# EAGLE board CT_schematic (EAGLE 7.6.0)

Size 100 x 80 mm. Coordinates in mm from the lower left corner, seen from the top.
Outline: 0,0 100,0 100,80 0,80 0,0
Copper layers (1*16): Top 0.035mm / dielectric 1.5mm / Bottom 0.035mm
Design rules "default": minimum track width 10mil, minimum drill 24mil, track to track 8mil, track to pad 8mil, pad to pad 8mil, via to via 8mil, smd to smd 8mil, copper to edge 40mil, drill to drill 8mil, minimum pad ring 10mil, minimum via ring 8mil, stop-mask expansion 4mil, vias tented up to drill 0mil, thermal gap 10mil

## Footprints (pad centres in the part's own frame; a part is rotated, then mirrored left to right if it is on the bottom)
C0603 = smd 0.8 x 0.8: 1 -0.762,0; 2 0.762,0
C0402 = smd 0.5 x 0.5: 1 -0.508,0; 2 0.508,0
C1210 = smd 1.2 x 2.5: 1 -1.524,0; 2 1.524,0
C0805 = smd 1.2 x 1.3: 1 -1.016,0; 2 1.016,0
2220 = smd 1.85 x 5.5: 1 -2.55,0; 2 2.55,0
C1206 = smd 1.3 x 1.6: 1 -1.524,0; 2 1.524,0
L0603 = smd 0.8 x 0.8: 1 -0.762,0; 2 0.762,0
R0603 = smd 0.8 x 0.8: 1 -0.762,0; 2 0.762,0
WLCSP90 = smd 0.25 x 0.25: A1 -1.8,1.6; A2 -1.4,1.6; A3 -1,1.6; A4 -0.6,1.6; A5 -0.2,1.6; A6 0.2,1.6; A7 0.6,1.6; A8 1,1.6; A9 1.4,1.6; A10 1.8,1.6; B1 -1.8,1.2; B2 -1.4,1.2; B3 -1,1.2; B4 -0.6,1.2; B5 -0.2,1.2; B6 0.2,1.2; B7 0.6,1.2; B8 1,1.2; B9 1.4,1.2; B10 1.8,1.2; C1 -1.8,0.8; C2 -1.4,0.8; C3 -1,0.8; C4 -0.6,0.8; C5 -0.2,0.8; C6 0.2,0.8; C7 0.6,0.8; C8 1,0.8; C9 1.4,0.8; C10 1.8,0.8; D1 -1.8,0.4; D2 -1.4,0.4; D3 -1,0.4; D4 -0.6,0.4; D5 -0.2,0.4; D6 0.2,0.4; D7 0.6,0.4; D8 1,0.4; D9 1.4,0.4; D10 1.8,0.4; E1 -1.8,0; E2 -1.4,0; E3 -1,0; E4 -0.6,0; E5 -0.2,0; E6 0.2,0; E7 0.6,0; E8 1,0; E9 1.4,0; E10 1.8,0; F1 -1.8,-0.4; F2 -1.4,-0.4; F3 -1,-0.4; F4 -0.6,-0.4; F5 -0.2,-0.4; F6 0.2,-0.4; F7 0.6,-0.4; F8 1,-0.4; F9 1.4,-0.4; F10 1.8,-0.4; G1 -1.8,-0.8; G2 -1.4,-0.8; G3 -1,-0.8; G4 -0.6,-0.8; G5 -0.2,-0.8; G6 0.2,-0.8; G7 0.6,-0.8; G8 1,-0.8; G9 1.4,-0.8; G10 1.8,-0.8; H1 -1.8,-1.2; H2 -1.4,-1.2; H3 -1,-1.2; H4 -0.6,-1.2; H5 -0.2,-1.2; H6 0.2,-1.2; H7 0.6,-1.2; H8 1,-1.2; H9 1.4,-1.2; H10 1.8,-1.2; J1 -1.8,-1.6; J2 -1.4,-1.6; J3 -1,-1.6; J4 -0.6,-1.6; J5 -0.2,-1.6; J6 0.2,-1.6; J7 0.6,-1.6; J8 1,-1.6; J9 1.4,-1.6; J10 1.8,-1.6
TST-110-05-T-D-RA = drill 1 pad 1.7 square: 1 0,0 | drill 1 pad 1.7: 2 0,2.54; 3 2.54,0; 4 2.54,2.54; 5 5.08,0; 6 5.08,2.54; 7 7.62,0; 8 7.62,2.54; 9 10.16,0; 10 10.16,2.54; 11 12.7,0; 12 12.7,2.54; 13 15.24,0; 14 15.24,2.54; 15 17.78,0; 16 17.78,2.54; 17 20.32,0; 18 20.32,2.54; 19 22.86,0; 20 22.86,2.54
SOT-23-8 = smd 0.4 x 1.2: 1 -0.975,-1.3; 2 -0.325,-1.3; 3 0.325,-1.3; 4 0.975,-1.3; 5 0.975,1.3; 6 0.325,1.3; 7 -0.325,1.3; 8 -0.975,1.3
182-009-MALE = drill 1.194 pad 1.524 octagon: 1 -5.537,10.923; 2 -2.769,10.923; 3 0,10.923; 4 2.769,10.923; 5 5.537,10.923; 6 -4.153,8.08; 7 -1.384,8.08; 8 1.384,8.08; 9 4.153,8.08 | hole 3.048: -12.446,9.501; 12.446,9.501
WNG008 = smd 0.45 x 0.55: 1 -1.27,0; 2 0,0; 3 1.27,0; 4 2.54,0; 5 2.54,7.5; 6 1.27,7.5; 7 0,7.5; 8 -1.27,7.53 | smd 4.9 x 4.75: PAD 0.635,3.75
RHB32_3P45X3P45 = smd 0.85 x 0.28: 1 -2.475,1.75; 2 -2.475,1.25; 3 -2.475,0.75; 4 -2.475,0.25; 5 -2.475,-0.25; 6 -2.475,-0.75; 7 -2.475,-1.25; 8 -2.475,-1.75; 17 2.475,-1.75; 18 2.475,-1.25; 19 2.475,-0.75; 20 2.475,-0.25; 21 2.475,0.25; 22 2.475,0.75; 23 2.475,1.25; 24 2.475,1.75 | smd 0.28 x 0.85: 9 -1.75,-2.475; 10 -1.25,-2.475; 11 -0.75,-2.475; 12 -0.25,-2.475; 13 0.25,-2.475; 14 0.75,-2.475; 15 1.25,-2.475; 16 1.75,-2.475; 25 1.75,2.475; 26 1.25,2.475; 27 0.75,2.475; 28 0.25,2.475; 29 -0.25,2.475; 30 -0.75,2.475; 31 -1.25,2.475; 32 -1.75,2.475 | smd 3.45 x 3.45: 33 0,0
FCI_10118193-0001LF = smd 0.4 x 1.35: 1 -1.3,2.675; 2 -0.65,2.675; 3 0,2.675; 4 0.65,2.675; 5 1.3,2.675 | smd 1.6 x 1.4: 6 -3.2,2.45; 7 3.2,2.45 | smd 1.9 x 1.9: 8 -1.2,0; 9 1.2,0 | hole 0.5: -3.3,0; 3.3,0
SOT143B = smd 1 x 0.7: 1 -0.75,-1 | smd 0.6 x 0.7: 2 0.95,-1; 3 0.95,1; 4 -0.95,1
QFN-28 = smd 0.813 x 0.305: 1 -2.451,1.5; 2 -2.451,1; 3 -2.451,0.5; 4 -2.451,0; 5 -2.451,-0.5; 6 -2.451,-1; 7 -2.451,-1.5; 15 2.451,-1.5; 16 2.451,-1; 17 2.451,-0.5; 18 2.451,0; 19 2.451,0.5; 20 2.451,1; 21 2.451,1.5 | smd 0.305 x 0.813: 8 -1.5,-2.451; 9 -1,-2.451; 10 -0.5,-2.451; 11 0,-2.451; 12 0.5,-2.451; 13 1,-2.451; 14 1.5,-2.451; 22 1.5,2.451; 23 1,2.451; 24 0.5,2.451; 25 0,2.451; 26 -0.5,2.451; 27 -1,2.451; 28 -1.5,2.451 | smd 3.607 x 3.607: 29 0,0
SJ-43515TS-SMT-TR = smd 2.2 x 3: 1 0.6,-7.4; 4 3.4,-7.4 | smd 3 x 3: 2 12.8,-7.4; 5 17,-3 | smd 2 x 3: 3 5.3,0; 6 2.5,0 | drill 1.8: P$7 4.5,-3.69; P$8 11.54,-3.69
ASEK = smd 1.4 x 1: 1 -1.1,-0.8; 2 1.1,-0.8; 3 1.1,0.8; 4 -1.1,0.8
ASFL1 = smd 1.7 x 1.5: 1 -1.27,-1.1; 2 1.27,-1.1; 3 1.27,1.1; 4 -1.27,1.1
MSOP-8_EP = smd 1.422 x 0.508: 1 -2.095,0.975; 2 -2.095,0.325; 3 -2.095,-0.325; 4 -2.095,-0.975; 5 2.095,-0.975; 6 2.095,-0.325; 7 2.095,0.325; 8 2.095,0.975 | smd 1.727 x 1.702: EPAD 0,0
SOIC-8_EP = smd 1.6 x 0.533: 1 -2.921,1.905; 2 -2.921,0.635; 3 -2.921,-0.635; 4 -2.921,-1.905; 5 2.921,-1.905; 6 2.921,-0.635; 7 2.921,0.635; 8 2.921,1.905 | smd 2.54 x 3.302: EPAD 0,0 | drill 0.406 pad 0.406: P$1 -0.508,0.635; P$2 0.381,0.635; P$3 -0.508,-0.635; P$4 0.381,-0.635
DFN8_2X3MC = smd 0.813 x 0.305: 1 -1.398,0.75; 2 -1.398,0.25; 3 -1.398,-0.25; 4 -1.398,-0.75; 5 1.398,-0.75; 6 1.398,-0.25; 7 1.398,0.25; 8 1.398,0.75 | smd 1.753 x 1.549: 9 0,0
JST-2-SMD = smd 1 x 4.6: 1 -1,-3.7; 2 1,-3.7 | smd 1.6 x 3.4: NC1 -3.4,1.5; NC2 3.4,1.5
SON-6 = smd 0.55 x 0.3: 1 -0.355,0.5 | smd 0.52 x 0.3: 2 -0.37,0; 3 -0.37,-0.5; 4 0.37,-0.5; 5 0.37,0; 6 0.37,0.5
DCU0008A_N = smd 0.5 x 0.3: 1 -1.6,0.75; 2 -1.6,0.25; 3 -1.6,-0.25; 4 -1.6,-0.75; 5 1.6,-0.75; 6 1.6,-0.25; 7 1.6,0.25; 8 1.6,0.75
SW_4-1437565-2 = smd 1.4 x 2.1: 1 -2.23,4.55; 2 -2.23,-4.55; 3 2.23,4.55; 4 2.23,-4.55
LGM67K-G1J2-24-Z = smd 0.8 x 1.4: A -2,0; C 0,0
NC7SZ125M5X = smd 1.3 x 0.7: 1 -1.3,0.95; 2 -1.3,0; 3 -1.3,-0.95; 4 1.3,-0.95; 5 1.3,0.95

## Placement (x,y rotation side)
C1  1e-06  [C0603]  -68.58,85.09 0 top  (outside the outline)
C2  1e-07  [C0603]  -72.39,85.09 0 top  (outside the outline)
C3  1e-07  [C0603]  -76.2,85.09 0 top  (outside the outline)
C4  1e-07  [C0603]  -80.01,85.09 0 top  (outside the outline)
C5  1e-07  [C0603]  -83.82,85.09 0 top  (outside the outline)
C6  1e-07  [C0603]  -87.63,85.09 0 top  (outside the outline)
C7  1e-07  [C0603]  -15.24,90.17 0 top  (outside the outline)
C8  4.7e-06  [C0603]  -49.53,85.09 0 top  (outside the outline)
C9  1e-08  [C0603]  -19.05,90.17 0 top  (outside the outline)
C10  1e-06  [C0603]  -22.86,90.17 0 top  (outside the outline)
C11  2.2e-06  [C0603]  -53.34,85.09 0 top  (outside the outline)
C12  2.2e-06  [C0603]  -57.15,85.09 0 top  (outside the outline)
C13  1e-06  [C0603]  -26.67,90.17 0 top  (outside the outline)
C14  1e-07  [C0402]  -76.2,90.17 0 top  (outside the outline)
C15  1e-07  [C0402]  -80.01,90.17 0 top  (outside the outline)
C16  1e-07  [C0402]  -83.82,90.17 0 top  (outside the outline)
C17  1e-08  [C0402]  -87.63,90.17 0 top  (outside the outline)
C18  1e-07  [C0402]  -91.44,90.17 0 top  (outside the outline)
C19  2.2e-06  [C0603]  -60.96,85.09 0 top  (outside the outline)
C20  1e-07  [C0402]  -15.24,95.25 0 top  (outside the outline)
C21  1e-07  [C0402]  -19.05,95.25 0 top  (outside the outline)
C22  2.2e-06  [C0603]  -64.77,85.09 0 top  (outside the outline)
C23  1e-06  [C0603]  -30.48,90.17 0 top  (outside the outline)
C24  2.2e-05  [C1210]  -38.1,68.58 0 top  (outside the outline)
C25  2.2e-05  [C1210]  -44.45,68.58 0 top  (outside the outline)
C26  1e-09  [C0402]  -22.86,95.25 0 top  (outside the outline)
C27  1e-09  [C0402]  -26.67,95.25 0 top  (outside the outline)
C28  1e-07  [C0402]  -30.48,95.25 0 top  (outside the outline)
C29  1e-07  [C0402]  -34.29,95.25 0 top  (outside the outline)
C30  1e-07  [C0402]  -38.1,95.25 0 top  (outside the outline)
C31  1e-07  [C0402]  -41.91,95.25 0 top  (outside the outline)
C32  1e-07  [C0402]  -45.72,95.25 0 top  (outside the outline)
C33  1e-05  [C0805]  -41.91,74.93 0 top  (outside the outline)
C34  1e-05  [C0805]  -46.99,74.93 0 top  (outside the outline)
C35  1e-05  [C0805]  -52.07,74.93 0 top  (outside the outline)
C36  1e-05  [C0805]  -57.15,74.93 0 top  (outside the outline)
C37  1e-05  [C0805]  -62.23,74.93 0 top  (outside the outline)
C38  1e-08  [C0402]  -49.53,95.25 0 top  (outside the outline)
C39  1e-08  [C0402]  -53.34,95.25 0 top  (outside the outline)
C40  1e-08  [C0402]  -57.15,95.25 0 top  (outside the outline)
C41  1e-08  [C0402]  -60.96,95.25 0 top  (outside the outline)
C42  6.8e-05  [2220]  -31.75,41.91 0 top  (outside the outline)
C43  1e-06  [C0603]  -34.29,90.17 0 top  (outside the outline)
C44  6.8e-05  [2220]  -39.37,41.91 0 top  (outside the outline)
C45  1e-05  [C1210]  -50.8,68.58 0 top  (outside the outline)
C46  1e-05  [C1210]  -57.15,68.58 0 top  (outside the outline)
C47  1e-05  [C1210]  -63.5,68.58 0 top  (outside the outline)
C48  1e-05  [C1210]  -69.85,68.58 0 top  (outside the outline)
C49  1e-07  [C0402]  -64.77,95.25 0 top  (outside the outline)
C50  1e-05  [C1206]  -76.2,67.31 0 top  (outside the outline)
C51  1e-05  [C1206]  -82.55,67.31 0 top  (outside the outline)
C52  1e-08  [C0402]  -68.58,95.25 0 top  (outside the outline)
C53  1e-07  [C0402]  -72.39,95.25 0 top  (outside the outline)
C54  1e-08  [C0402]  -76.2,95.25 0 top  (outside the outline)
C55  1e-07  [C0402]  -80.01,95.25 0 top  (outside the outline)
C56  1e-08  [C0402]  -83.82,95.25 0 top  (outside the outline)
C57  1e-08  [C0402]  -87.63,95.25 0 top  (outside the outline)
C58  1e-08  [C0402]  -91.44,95.25 0 top  (outside the outline)
F1  240.0  [L0603]  -38.1,90.17 0 top  (outside the outline)
R2  1000.0  [R0603]  -41.91,90.17 0 top  (outside the outline)
R7  4700.0  [R0603]  -45.72,90.17 0 top  (outside the outline)
R8  4700.0  [R0603]  -49.53,90.17 0 top  (outside the outline)
R9  10000.0  [R0603]  -15.24,80.01 0 top  (outside the outline)
R10  10000.0  [R0603]  -20.32,80.01 0 top  (outside the outline)
R11  10000.0  [R0603]  -25.4,80.01 0 top  (outside the outline)
R12  10000.0  [R0603]  -30.48,80.01 0 top  (outside the outline)
R13  10000.0  [R0603]  -35.56,80.01 0 top  (outside the outline)
R14  10000.0  [R0603]  -40.64,80.01 0 top  (outside the outline)
R15  10000.0  [R0603]  -45.72,80.01 0 top  (outside the outline)
R16  10000.0  [R0603]  -50.8,80.01 0 top  (outside the outline)
R17  10000.0  [R0603]  -55.88,80.01 0 top  (outside the outline)
R18  120.0  [R0603]  -53.34,90.17 0 top  (outside the outline)
R19  10000.0  [R0603]  -60.96,80.01 0 top  (outside the outline)
R20  10000.0  [R0603]  -66.04,80.01 0 top  (outside the outline)
R21  10000.0  [R0603]  -71.12,80.01 0 top  (outside the outline)
R22  10000.0  [R0603]  -76.2,80.01 0 top  (outside the outline)
R23  10000.0  [R0603]  -81.28,80.01 0 top  (outside the outline)
R24  47000.0  [R0603]  -86.36,80.01 0 top  (outside the outline)
R25  47000.0  [R0603]  -15.24,85.09 0 top  (outside the outline)
R26  47000.0  [R0603]  -20.32,85.09 0 top  (outside the outline)
R27  680.0  [R0603]  -57.15,90.17 0 top  (outside the outline)
R28  3900.0  [R0603]  -60.96,90.17 0 top  (outside the outline)
R29  2200.0  [R0603]  -64.77,90.17 0 top  (outside the outline)
R30  10000.0  [R0603]  -25.4,85.09 0 top  (outside the outline)
R31  4031.5447154472  [R0603]  -71.12,74.93 0 top  (outside the outline)
R32  2200.0  [R0603]  -68.58,90.17 0 top  (outside the outline)
R33  10000.0  [R0603]  -30.48,85.09 0 top  (outside the outline)
R34  10000.0  [R0603]  -35.56,85.09 0 top  (outside the outline)
R35  82000.0  [R0603]  -40.64,85.09 0 top  (outside the outline)
R36  300000.0  [R0603]  -76.2,74.93 0 top  (outside the outline)
R37  120000.0  [R0603]  -81.28,74.93 0 top  (outside the outline)
R38  2000.0  [R0603]  -72.39,90.17 0 top  (outside the outline)
R39  10000.0  [R0603]  -45.72,85.09 0 top  (outside the outline)
R40  200000.0  [R0603]  -86.36,74.93 0 top  (outside the outline)
U1  STM32F405OGY6  [WLCSP90]  -63.5,52.07 0 top  (outside the outline)
U2  TST-110-05-T-D-RA  [TST-110-05-T-D-RA]  -46.99,58.42 0 top  (outside the outline)
U3  MAX3051EKA+T  [SOT-23-8]  -87.63,67.31 0 top  (outside the outline)
U4  182-009-113R531  [182-009-MALE]  -36.83,6.35 0 top  (outside the outline)
U5  S25FL128SDPNFI001  [WNG008]  -76.2,25.4 0 top  (outside the outline)
U6  TUSB1210BRHBR  [RHB32_3P45X3P45]  -73.66,60.96 0 top  (outside the outline)
U7  10118193-0001LF  [FCI_10118193-0001LF]  -35.56,50.8 0 top  (outside the outline)
U8  prtr5v0u2ax  [SOT143B]  -24.13,100.33 0 top  (outside the outline)
U9  10118193-0001LF  [FCI_10118193-0001LF]  -45.72,50.8 0 top  (outside the outline)
U10  prtr5v0u2ax  [SOT143B]  -36.83,100.33 0 top  (outside the outline)
U11  WM8731CLSEFL  [QFN-28]  -30.48,68.58 0 top  (outside the outline)
U12  SJ-43515TS-SMT-TR  [SJ-43515TS-SMT-TR]  -78.74,10.16 0 top  (outside the outline)
U13  SJ-43515TS-SMT-TR  [SJ-43515TS-SMT-TR]  -39.37,31.75 0 top  (outside the outline)
U14  ASEK-32.768KHz-ECST  [ASEK]  -66.04,60.96 0 top  (outside the outline)
U15  ASFL1-12.288MHZ-EC-T  [ASFL1]  -60.96,41.91 0 top  (outside the outline)
U16  ASFL1-19.2MHZ-NCS  [ASFL1]  -78.74,41.91 0 top  (outside the outline)
U17  ASFL1-25MHZ-NCS  [ASFL1]  -26.67,52.07 0 top  (outside the outline)
U18  MIC47100YMME  [MSOP-8_EP]  -16.51,74.93 0 top  (outside the outline)
U19  MIC5234YME  [SOIC-8_EP]  -82.55,59.69 0 top  (outside the outline)
U20  MCP73831T-2ACI/MC  [DFN8_2X3MC]  -60.96,99.06 0 top  (outside the outline)
U21  S2B-PH-SM4-TB(LF)(SN)  [JST-2-SMD]  -22.86,43.18 0 top  (outside the outline)
U22  TPS3895ADRYR  [SON-6]  -54.61,99.06 0 top  (outside the outline)
U23  LSF0102DCTR  [DCU0008A_N]  -49.53,99.06 0 top  (outside the outline)
U24  4-1437565-2  [SW_4-1437565-2]  -55.88,27.94 0 top  (outside the outline)
U25  Q65110A2395  [LGM67K-G1J2-24-Z]  -17.78,68.58 0 top  (outside the outline)
U26  nc7sz125m5x  [NC7SZ125M5X]  -22.86,73.66 0 top  (outside the outline)
U27  nc7sz125m5x  [NC7SZ125M5X]  -29.21,73.66 0 top  (outside the outline)
U28  nc7sz125m5x  [NC7SZ125M5X]  -35.56,73.66 0 top  (outside the outline)

## Library data of the parts
C1-C58 F1 R2 R7-R40 U1-U28 = circuit_tree

## Nets
CLK_U1_B10: U1.B10 U14.3
CLK_U1_F10: U1.F10 U17.3
CLK_U6_1: U6.1 U16.3
CLK_U11_1: U11.1 U15.3
GND: C1.2 C2.2 C3.2 C4.2 C5.2 C6.2 C7.2 C8.2 C9.2 C10.2 C11.2 C12.2 C13.2 C14.2 C15.2 C16.2 C17.2 C18.2 C19.2 C20.2 C21.2 C22.2 C23.2 C27.2 C28.2 C29.2 C30.2 C31.2 C32.2 C33.2 C34.2 C35.2 C36.2 C37.2 C38.2 C39.2 C40.2 C41.2 C42.2 C43.2 C44.2 C45.2 C46.2 C47.2 C48.2 C49.2 C50.2 C51.2 C52.2 C53.2 C54.2 C55.2 C56.2 C57.2 C58.2 R2.2 R10.2 R11.2 R17.2 R23.2 R24.2 R25.2 R26.2 R29.2 R32.2 R35.2 R37.2 R38.2 U1.C1 U1.C9 U1.E5 U1.E7 U1.E8 U1.H10 U2.4 U2.6 U2.8 U2.10 U2.12 U2.14 U2.16 U2.18 U2.20 U3.2 U3.8 U4.5 U5.4 U5.PAD U6.33 U7.5 U7.6 U7.7 U7.8 U7.9 U8.1 U9.5 U9.6 U9.7 U9.8 U9.9 U10.1 U11.4 U11.15 U11.19 U11.25 U11.26 U11.29 U12.1 U13.1 U14.2 U15.2 U16.2 U17.2 U18.3 U18.EPAD U19.7 U19.EPAD U20.6 U20.9 U21.2 U22.2 U23.1 U25.C U26.2 U26.3 U27.1 U27.3 U28.1 U28.3
INPUT_USBPOWER_5V: C23.1 C50.1 R39.2 U6.22 U7.1 U8.4 U20.1 U20.2
NET_U1_A7: R10.1 U1.A7
NET_U1_A8: R9.1 U1.A8
NET_U1_B1: C12.1 U1.B1
NET_U1_D9: R11.1 U1.D9
NET_U1_F4: C11.1 U1.F4
NET_U1_G9: C9.1 C10.1 F1.1 U1.G9
NET_U1_G10: R7.1 U1.G10 U27.4
NET_U1_J8: U25.A
NET_U1_J10: U24.3 U24.4
NET_U2_19: R17.1 U2.19
NET_U3_6: R18.2 U3.6
NET_U4_2: R18.2 U3.6 U4.2
NET_U4_3: R18.1 U3.7 U4.3
NET_U5_3: R19.1 U5.3
NET_U5_7: R21.1 U5.7
NET_U6_11: R22.1 U6.11
NET_U6_12: C22.1 U6.12
NET_U6_14: R23.1 U6.14
NET_U6_20: C19.1 U6.20
NET_U6_27: R8.1 U6.27 U28.4
NET_U7_2: U6.19 U7.2 U8.3
NET_U7_3: U6.18 U7.3 U8.2
NET_U11_9: U11.9
NET_U11_20: C32.1 C37.1 U11.20
NET_U12_2: C25.1 R25.1 U12.2
NET_U12_5: C24.1 R24.1 U12.5
NET_U12_13: C24.2
NET_U12_14: C25.2
NET_U13_5: C26.1 C27.1 R26.1 R27.1 U13.5
NET_U13_21: R27.2
NET_U13_22: C26.2
NET_U18_6: R28.2 R29.1 U18.6
NET_U19_4: R31.2 R32.1 U19.4
NET_U20_5: R39.1 U20.5
NET_U20_8: R38.1 U20.8
NET_U22_1: R34.1 R35.1 U22.1
NET_U22_3: R36.2 R37.1 U22.3
NET_U22_4: R33.1 U22.4 U26.4 U27.2 U28.2
NET_U23_8: R40.1 U23.8
NET_U24_1: R2.1 U24.1 U24.2
PROC_CAN1_RX_TOIOBUF: U23.4
PROC_CAN1_RX_TOXCVR: U3.4 U23.5
PROC_CAN1_TX_TOIOBUF: U23.3
PROC_CAN1_TX_TOXCVR: U3.1 U23.6
PROC_I2S3_CK: U1.D5 U11.7
PROC_I2S3_EXT_SD: U1.C4 U11.10
PROC_I2S3_SD: U1.A3 U11.8
PROC_I2S3_WS: U1.J9 U11.9 U11.11
PROC_SPI2_MISO: U1.J2 U5.2
PROC_SPI2_MOSI: U1.H1 U5.5
PROC_SPI2_NSS: R20.1 U1.C3 U5.1
PROC_SPI2_SCK: U1.B2 U5.6
PROC_SYS_JTCK_SWCLK: R15.1 U1.A2 U2.9
PROC_SYS_JTDI: R13.1 U1.B3 U2.5
PROC_SYS_JTDO_SWO: U1.B6 U2.13
PROC_SYS_JTMS_SWDIO: R14.1 U1.D4 U2.7
PROC_SYS_JTRST: R12.1 U1.A6 U2.3
PROC_USB_OTG_FS_DM: U1.C1 U9.2 U10.3
PROC_USB_OTG_FS_DP: U1.C2 U9.3 U10.2
PROC_USB_OTG_FS_VBUS: C13.1 U1.D2 U9.1 U10.4
PROC_USB_OTG_HS_ULPI_CK: U1.G8 U6.26
PROC_USB_OTG_HS_ULPI_D0: U1.H9 U6.3
PROC_USB_OTG_HS_ULPI_D1: U1.G7 U6.4
PROC_USB_OTG_HS_ULPI_D2: U1.H7 U6.5
PROC_USB_OTG_HS_ULPI_D3: U1.H4 U6.6
PROC_USB_OTG_HS_ULPI_D4: U1.J4 U6.7
PROC_USB_OTG_HS_ULPI_D5: U1.J3 U6.9
PROC_USB_OTG_HS_ULPI_D6: U1.J1 U6.10
PROC_USB_OTG_HS_ULPI_D7: U1.D7 U6.13
PROC_USB_OTG_HS_ULPI_DIR: U1.D10 U6.31
PROC_USB_OTG_HS_ULPI_NXT: U1.E9 U6.2
PROC_USB_OTG_HS_ULPI_STP: U1.E10 U6.29
RST_OUT_U2_SRESET_B: R16.1 U2.15 U26.1
VCC_S1_3V7: C42.1 C43.1 C45.1 C46.1 C51.1 R30.1 R30.2 U18.1 U18.2 U18.4 U18.5 U19.5 U19.8 U20.3 U20.4 U21.1
VCC_TIER1_1V8: C1.1 C2.1 C3.1 C4.1 C5.1 C6.1 C7.1 C8.1 C15.1 C17.1 C20.1 C21.1 C28.1 C29.1 C30.1 C31.1 C33.1 C34.1 C35.1 C36.1 C44.1 C49.1 C54.1 C55.1 C56.1 C57.1 C58.1 F1.2 R7.2 R8.2 R9.2 R12.2 R13.2 R14.2 R15.2 R16.2 R19.2 R20.2 R21.2 R22.2 R28.1 R33.2 R34.2 R36.1 U1.A1 U1.A10 U1.B8 U1.E4 U1.E6 U1.F7 U2.1 U5.8 U6.28 U6.30 U6.32 U11.3 U11.5 U11.12 U11.18 U18.7 U18.8 U22.6 U23.2 U26.5 U27.5 U28.5
VCC_TIER1_3V3: C14.1 C16.1 C18.1 C38.1 C39.1 C40.1 C41.1 C47.1 C48.1 C52.1 C53.1 R31.1 R40.2 U2.2 U3.3 U6.21 U14.4 U15.4 U16.4 U17.4 U19.1 U23.7

## Tracks (layer width: path | path; a pad name or v marks a point on that pad's centre or on a via)
CLK_U1_B10  (1 unrouted)
CLK_U1_F10  (1 unrouted)
CLK_U6_1  (1 unrouted)
CLK_U11_1  (1 unrouted)
GND  (128 unrouted)
INPUT_USBPOWER_5V  (7 unrouted)
NET_U1_A7  (1 unrouted)
NET_U1_A8  (1 unrouted)
NET_U1_B1  (1 unrouted)
NET_U1_D9  (1 unrouted)
NET_U1_F4  (1 unrouted)
NET_U1_G9  (3 unrouted)
NET_U1_G10  (2 unrouted)
NET_U1_J10  (1 unrouted)
NET_U2_19  (1 unrouted)
NET_U3_6  (1 unrouted)
NET_U4_2  (2 unrouted)
NET_U4_3  (2 unrouted)
NET_U5_3  (1 unrouted)
NET_U5_7  (1 unrouted)
NET_U6_11  (1 unrouted)
NET_U6_12  (1 unrouted)
NET_U6_14  (1 unrouted)
NET_U6_20  (1 unrouted)
NET_U6_27  (2 unrouted)
NET_U7_2  (2 unrouted)
NET_U7_3  (2 unrouted)
NET_U11_20  (2 unrouted)
NET_U12_2  (2 unrouted)
NET_U12_5  (2 unrouted)
NET_U13_5  (4 unrouted)
NET_U18_6  (2 unrouted)
NET_U19_4  (2 unrouted)
NET_U20_5  (1 unrouted)
NET_U20_8  (1 unrouted)
NET_U22_1  (2 unrouted)
NET_U22_3  (2 unrouted)
NET_U22_4  (4 unrouted)
NET_U23_8  (1 unrouted)
NET_U24_1  (2 unrouted)
PROC_CAN1_RX_TOXCVR  (1 unrouted)
PROC_CAN1_TX_TOXCVR  (1 unrouted)
PROC_I2S3_CK  (1 unrouted)
PROC_I2S3_EXT_SD  (1 unrouted)
PROC_I2S3_SD  (1 unrouted)
PROC_I2S3_WS  (2 unrouted)
PROC_SPI2_MISO  (1 unrouted)
PROC_SPI2_MOSI  (1 unrouted)
PROC_SPI2_NSS  (2 unrouted)
PROC_SPI2_SCK  (1 unrouted)
PROC_SYS_JTCK_SWCLK  (2 unrouted)
PROC_SYS_JTDI  (2 unrouted)
PROC_SYS_JTDO_SWO  (1 unrouted)
PROC_SYS_JTMS_SWDIO  (2 unrouted)
PROC_SYS_JTRST  (2 unrouted)
PROC_USB_OTG_FS_DM  (2 unrouted)
PROC_USB_OTG_FS_DP  (2 unrouted)
PROC_USB_OTG_FS_VBUS  (3 unrouted)
PROC_USB_OTG_HS_ULPI_CK  (1 unrouted)
PROC_USB_OTG_HS_ULPI_D0  (1 unrouted)
PROC_USB_OTG_HS_ULPI_D1  (1 unrouted)
PROC_USB_OTG_HS_ULPI_D2  (1 unrouted)
PROC_USB_OTG_HS_ULPI_D3  (1 unrouted)
PROC_USB_OTG_HS_ULPI_D4  (1 unrouted)
PROC_USB_OTG_HS_ULPI_D5  (1 unrouted)
PROC_USB_OTG_HS_ULPI_D6  (1 unrouted)
PROC_USB_OTG_HS_ULPI_D7  (1 unrouted)
PROC_USB_OTG_HS_ULPI_DIR  (1 unrouted)
PROC_USB_OTG_HS_ULPI_NXT  (1 unrouted)
PROC_USB_OTG_HS_ULPI_STP  (1 unrouted)
RST_OUT_U2_SRESET_B  (2 unrouted)
VCC_S1_3V7  (15 unrouted)
VCC_TIER1_1V8  (65 unrouted)
VCC_TIER1_3V3  (21 unrouted)